# Altium PCB 智能灯.PcbDoc
Units mm, origin at the board's own origin, x right, y up, seen from the top; angles counter-clockwise.
Board outline 97.71 x 98.77 mm, 2 copper layers (Top Layer, Bottom Layer); 48 components, 37 nets, 191 pads, 32 vias.
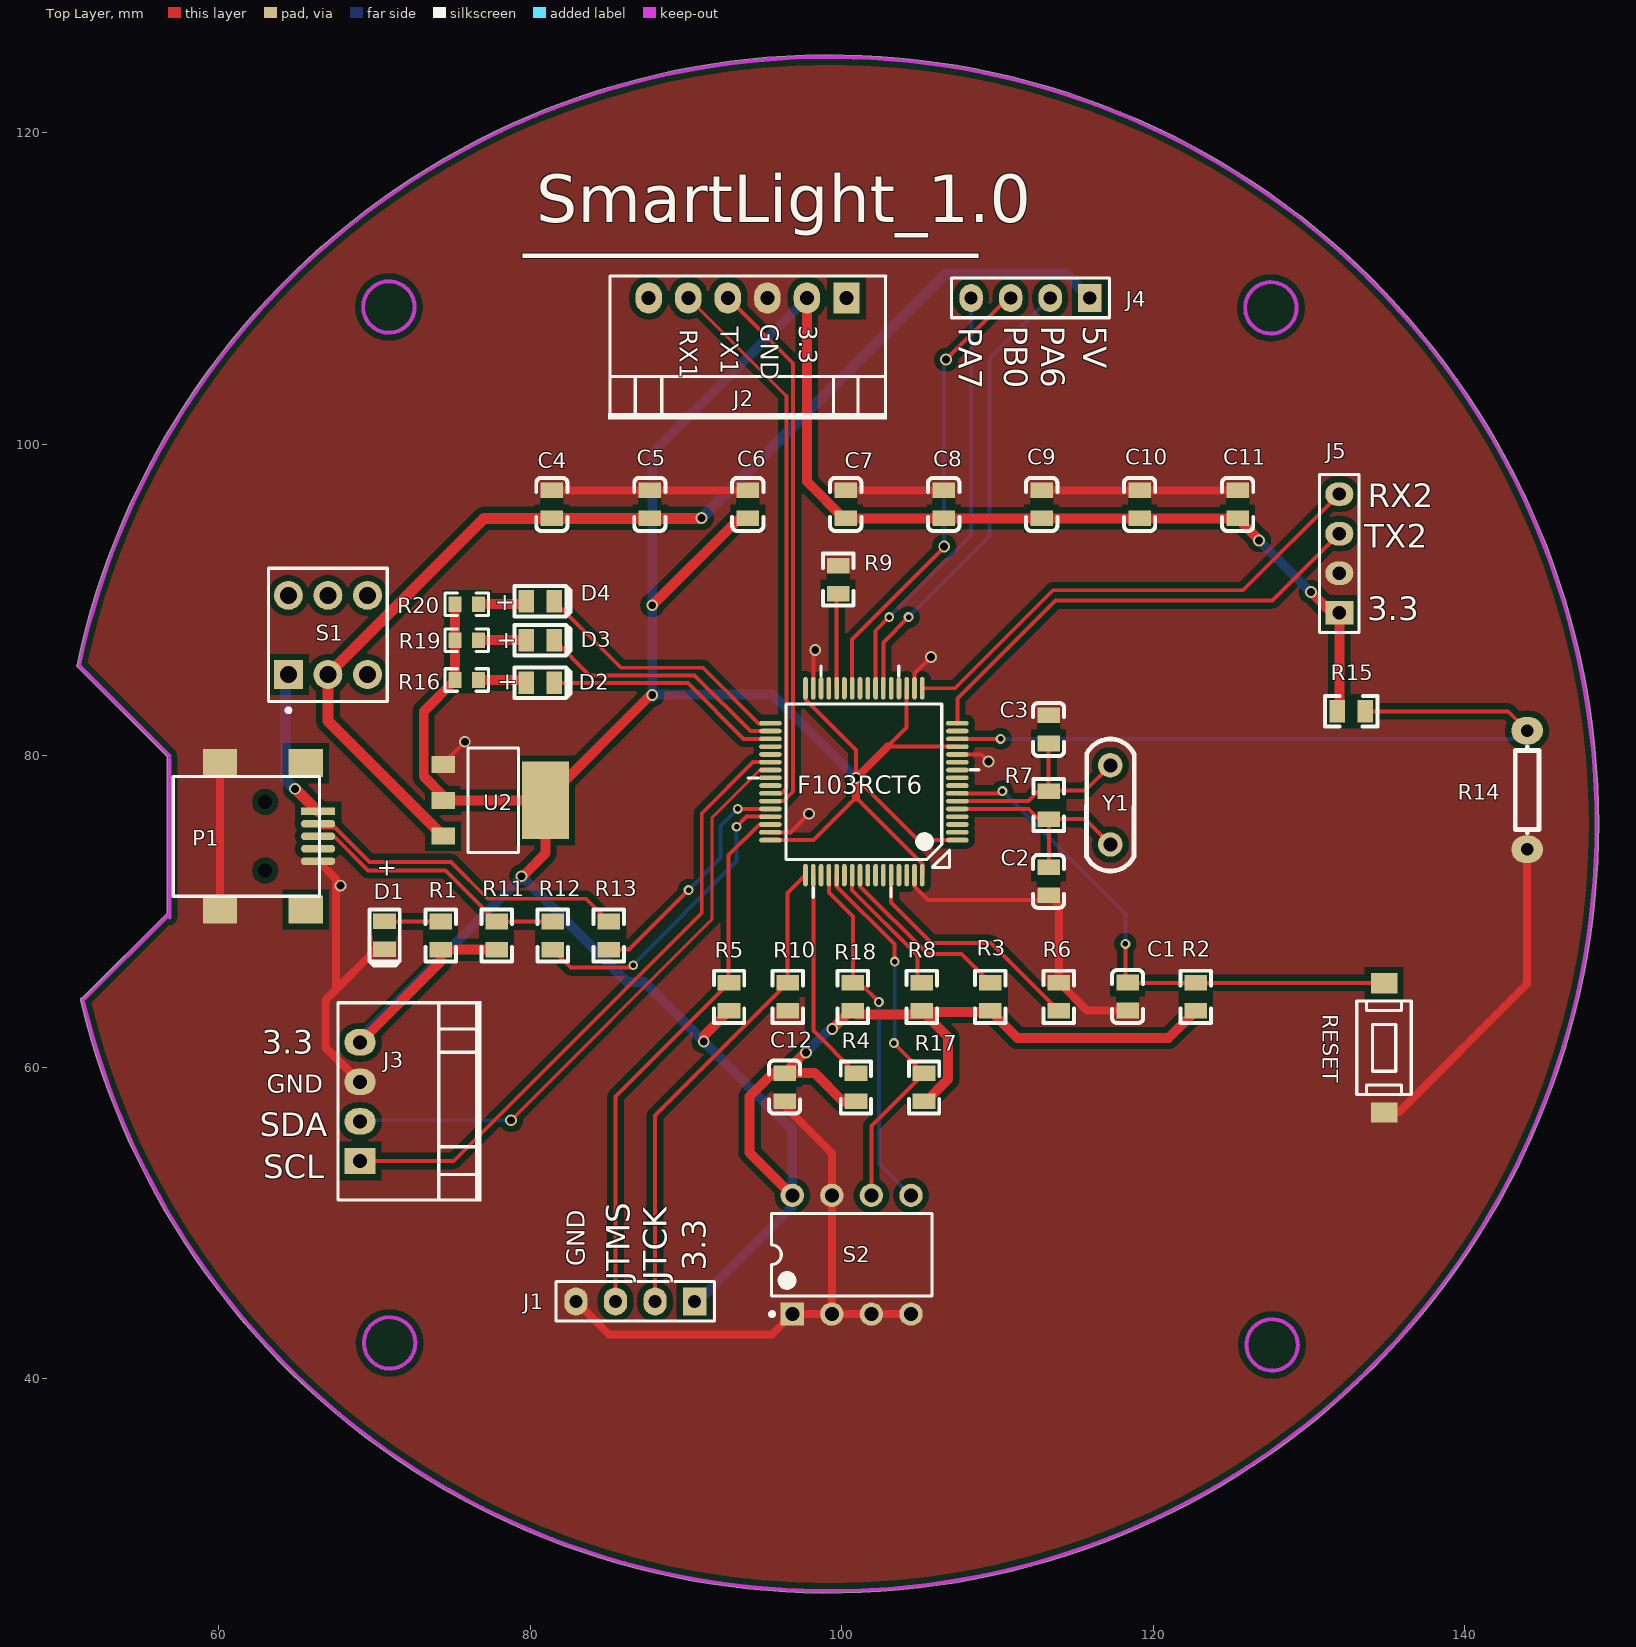
[diagram p0: Top Layer view]
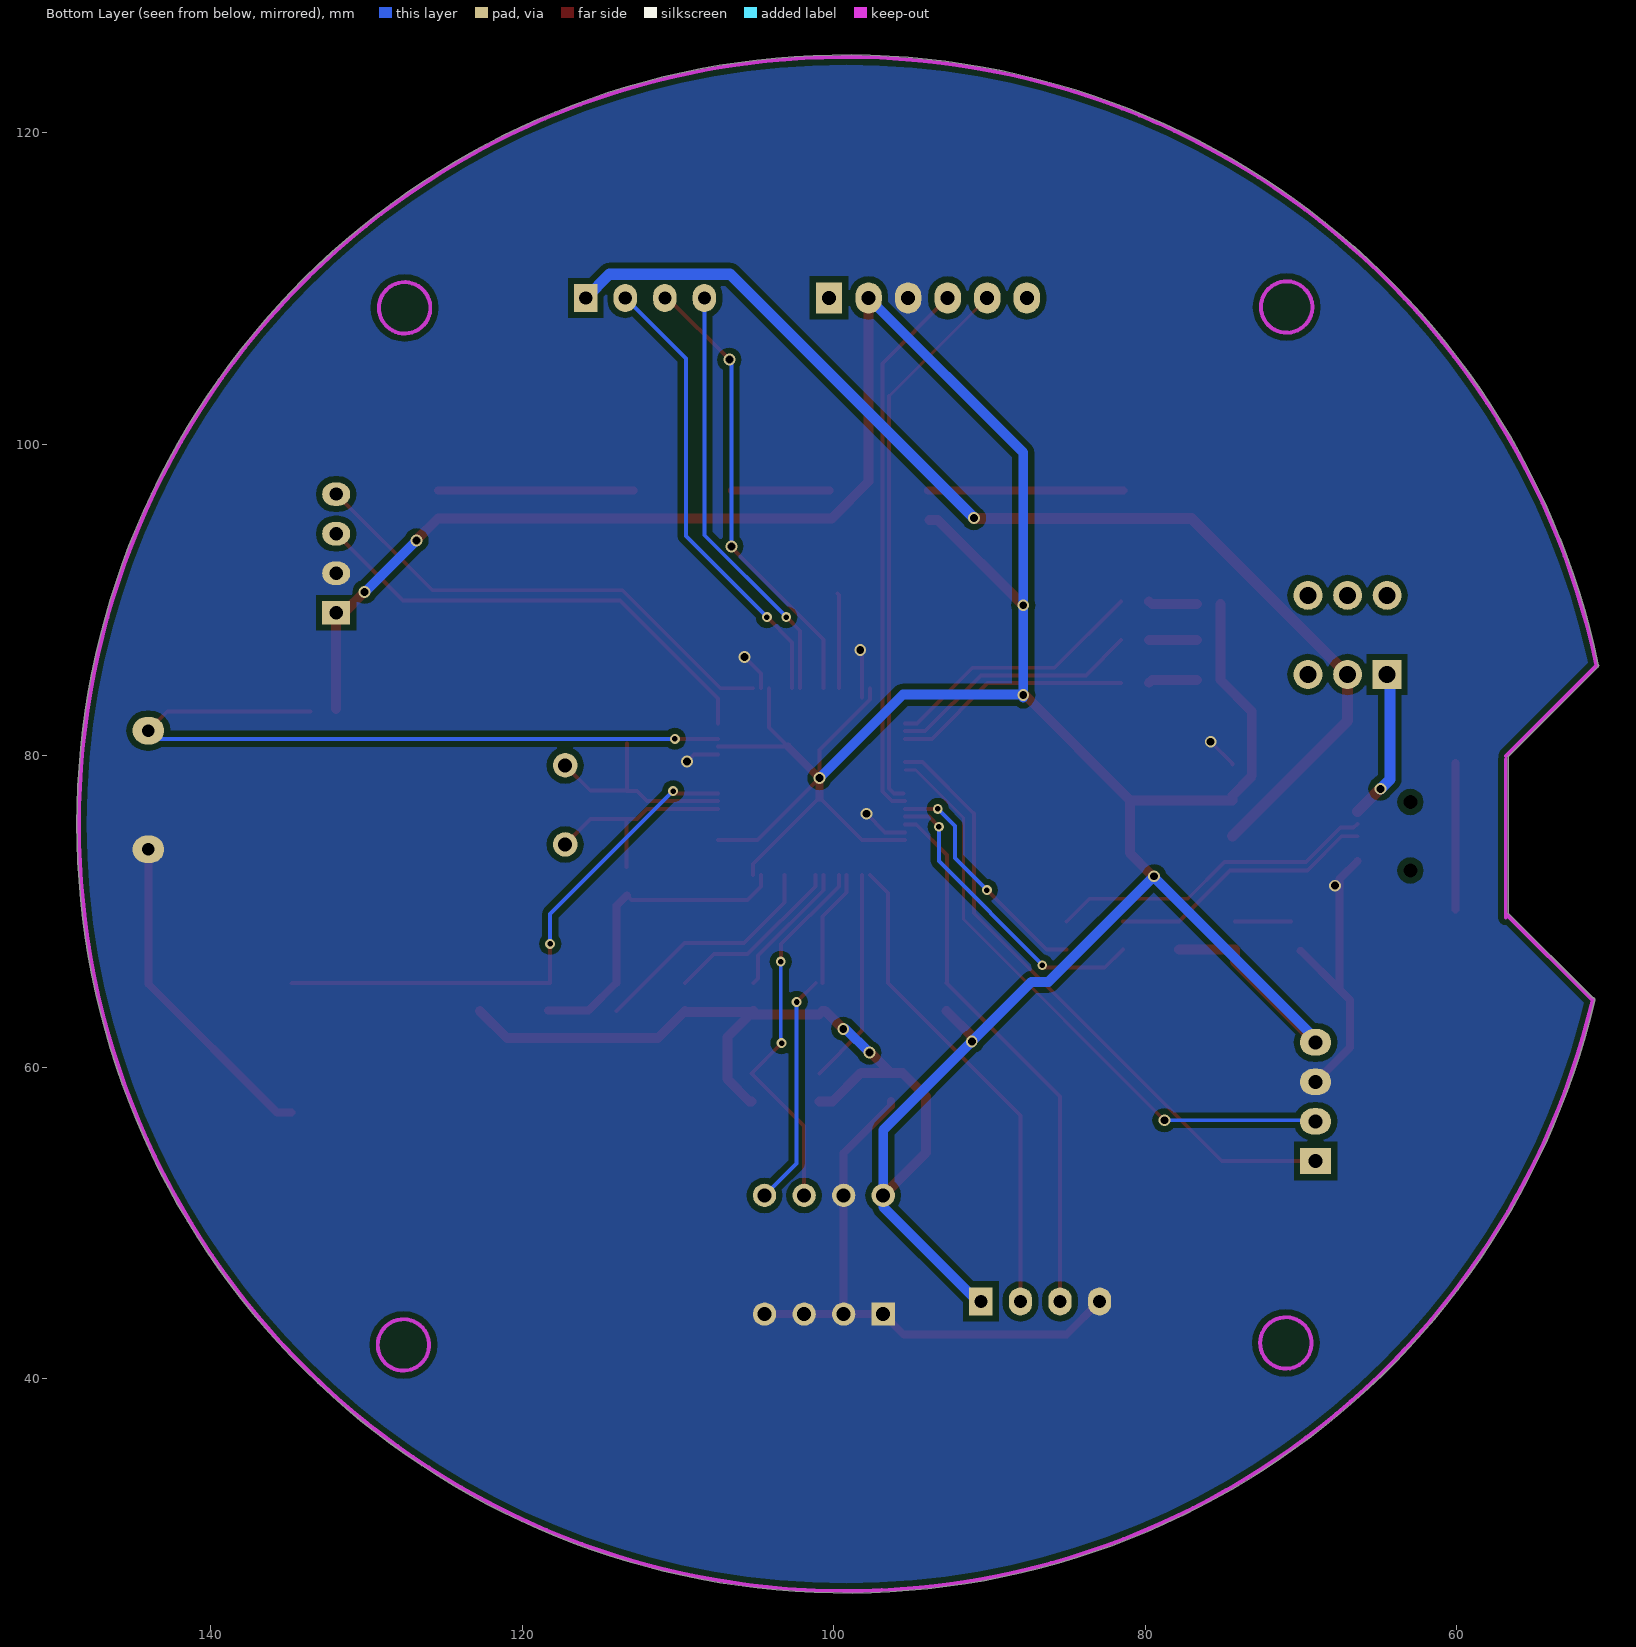
[diagram p1: Bottom Layer view, seen from below]
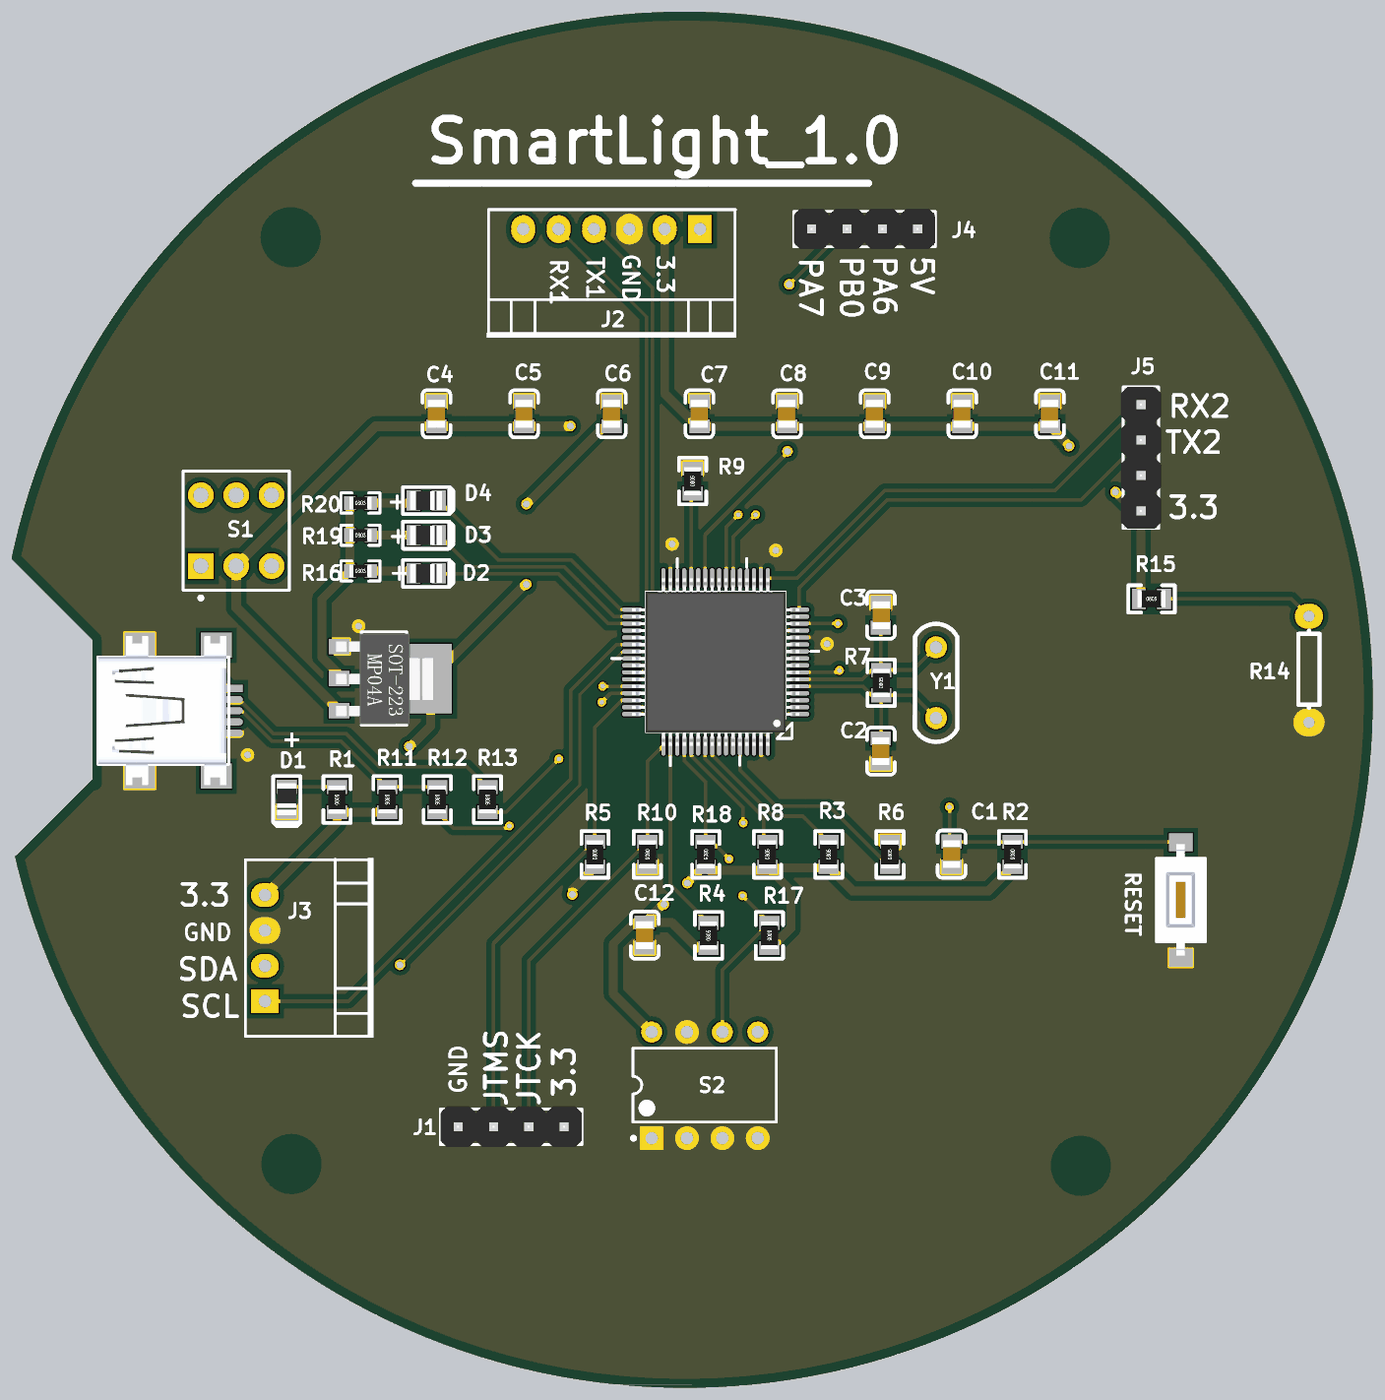
[diagram p2: 3D render of the assembled board from above, using the file's embedded part models]

## Layer stack, top to bottom
Top Solder: solder mask 0.0102, Solder Resist, Dk 3.5
Top Layer: signal copper 0.0356
Dielectric 1: dielectric 0.32, FR-4, Dk 4.8
Bottom Layer: signal copper 0.0356
Bottom Solder: solder mask 0.0102, Solder Resist, Dk 3.5

## Board outline
50.891,85.815 cw(c99.212,75.616) 148.598,75.616 cw(c99.212,75.616) 51.138,64.308 cw(c51.262,64.337) 51.254,64.464 56.692,69.903 56.692,79.932 50.93,85.695 cw(c51.016,85.789)

## Design rules (kind name [scope] priority, off if disabled: settings)
Clearance [All] p1: gap=0.178
PlaneConnect [All] p1: planeconnectstyle=Direct reliefexpansion=0.508 reliefentries=4 reliefconductorwidth=0.254 reliefairgap=0.254
PolygonConnect [All] p1: connectstyle=Direct reliefconductorwidth=0.254 reliefentries=4 polygonreliefangle="90 Angle" airgapwidth=0.254
RoutingVias [All] p1: holewidth=0.356 width=0.635 viastyle="Through Hole" minholewidth=0.305 minwidth=0.508 maxholewidth=0.711 maxwidth=1.27
SolderMaskExpansion [All] p1: expansion=0.102
Width [All] p1: maxlimit=1.016 minlimit=0.178 preferedwidth=0.254
28 further rules are at their usual default settings.

## Components (designator, comment, footprint, x,y, rotation, side; value= is the part's Value field where it differs from the comment)
C1 "0.1uF" 0805c 118.357,64.538 r270 top
C2 "22pF" 0805c 113.284,71.933 r90 top
C3 "22pF" 0805c 113.284,81.686 r270 top
C4 "10uF" 0805c 81.382,96.139 r90 top
C5 "0.1uF" 0805c 87.674,96.139 r90 top
C6 "10uF" 0805c 93.965,96.139 r90 top
C7 "0.1uF" 0805c 100.257,96.139 r90 top
C8 "0.1uF" 0805c 106.549,96.139 r90 top
C9 "0.1uF" 0805c 112.841,96.139 r90 top
C10 "0.1uF" 0805c 119.133,96.139 r90 top
C11 "0.1uF" 0805c 125.425,96.139 r90 top
C12 "104" 0805C 96.33,58.721 r90 top
D1 "LED" 0805d 70.637,68.466 r270 top
D2 "LED" 0805d 80.645,84.684 r0 top
D3 "LED" 0805d 80.645,87.427 r0 top
D4 "LED" 0805d 80.645,89.916 r0 top
F103RCT6 "STM32F103RCT6" LQFP64-0.5MM 101.422,78.334 r0 top (schematic designator U1)
J1 "SIP4" P4_2.54-1 86.741,44.958 r180 top
J2 "SIP6" P6_2.54-3 100.305,109.398 r180 top
J3 "SIP4" P4_2.54-3 69.063,53.975 r90 top
J4 "SIP4" P4_2.54-1 112.116,109.398 r180 top
J5 "SIP4" P4_2.54-1 131.953,92.989 r90 top
P1 "MiniUSB" USB_MINI_5P 57.074,74.828 r90 top
R1 "1k" 0805r 74.238,68.453 r90 top
R2 "10k" 0805r 122.733,64.516 r270 top
R3 "10k" 0805r 109.542,64.516 r90 top
R4 "10k" 0805r 100.914,58.699 r90 top
R5 "10k" 0805r 92.761,64.516 r90 top
R6 "10k" 0805r 113.939,64.516 r90 top
R7 "1M" 0805R 113.306,76.831 r90 top
R8 "10k" 0805r 105.145,64.516 r90 top
R9 "10k" 0805r 99.771,91.313 r90 top
R10 "10k" 0805r 96.52,64.516 r270 top
R11 "1k" 0805r 77.838,68.453 r270 top
R12 "1k" 0805r 81.439,68.453 r270 top
R13 "1k" 0805r 85.039,68.453 r270 top
R14 "Res2" AXIAL0.3 144.018,77.8 r270 top
R15 "10k" 0805R 132.715,82.855 r0 top
R16 "1k" 0603R 75.921,84.861 r0 top
R17 "4.7k" 0805R 105.283,58.699 r270 top
R18 "4.7k" 0805R 100.711,64.516 r270 top
R19 "1k" 0603R 75.921,87.427 r0 top
R20 "1k" 0603R 75.921,89.738 r0 top
RESET "SW-PB_DIP" KEY_SIM2P 134.823,61.239 r90 top
S1 "SW-DPDT" DPDT-6 67.005,87.757 r90 top
S2 "SW-DIP4" DIP-8 100.635,47.955 r90 top
U2 "AMS117-3.3" SOT-223 80.975,77.14 r270 top
Y1 "8MHz" 0.1UF 117.246,76.842 r270 top

## Footprints (in the part's own frame and the unit in brackets; to place one, negate y for a bottom-side part, rotate by r counter-clockwise, add the part's x,y. Pads: shape width x height; smd on the part's side, far side on the other; paste and mask are expansions set on the pad)
0.1UF [mil]
  round 62 hole 35.43: 1(-100,0) 2(100,0)
  silkscreen extent -166,-60 167,60
0603R [mm]
  rect 0.85x1 smd: 1(-0.75,0) 2(0.75,0)
  Top Layer pour cut-out: -0.33,0.495 -0.33,-0.495 0.33,-0.495 0.33,0.495
  silkscreen extent -1.4,-0.72 1.4,0.72, body extent -0.8,-0.46 0.8,0.44, height 0.5
0805c [mm]
  rect 1x1.45 smd: 1(-0.9,0) 2(0.9,0)
  Top Layer pour cut-out: -0.432,0.749 -0.432,-0.737 0.406,-0.737 0.406,0.749
  silkscreen extent -1.7,-1 1.7,1, body extent -1,-0.61 1,0.64, height 1
0805C [mm]
  rect 1x1.45 smd: 1(-0.9,0) 2(0.9,0)
  Top Layer pour cut-out: -0.432,0.749 -0.432,-0.737 0.406,-0.737 0.406,0.749
  silkscreen extent -1.7,-1 1.7,1, body extent -1,-0.61 1,0.64, height 1
0805d [mm]
  rect 1x1.45 smd: 1(-0.9,0) 2(0.9,0)
  Top Layer pour cut-out: -0.432,0.749 -0.432,-0.737 0.406,-0.737 0.406,0.749
  silkscreen extent -1.66,-0.98 1.94,0.98, body extent -1.16,-0.68 1.14,0.67, height 0.76
0805r [mm]
  rect 1x1.45 smd: 1(-0.9,0) 2(0.9,0)
  Top Layer pour cut-out: -0.432,0.749 -0.432,-0.737 0.406,-0.737 0.406,0.749
  silkscreen extent -1.68,-0.98 1.68,0.98, body extent -1,-0.62 1,0.63, height 0.5
0805R [mm]
  rect 1x1.45 smd: 1(-0.9,0) 2(0.9,0)
  Top Layer pour cut-out: -0.432,0.749 -0.432,-0.737 0.406,-0.737 0.406,0.749
  silkscreen extent -1.68,-0.98 1.68,0.98, body extent -1,-0.62 1,0.63, height 0.5
AXIAL0.3 [mil]
  oval 70x80 hole 32: 1(-150,0) 2(150,0)
  silkscreen extent -109,-30 109,30
DIP-8 [mm] "DIP; 8 Leads; Row Spacing 7.62 mm; Pitch 2.54 mm"
  rect 1.5x1.5 hole 0.9: 1(-3.81,3.81)
  round 1.5 hole 0.9: 2(-3.81,1.27) 3(-3.81,-1.27) 4(-3.81,-3.81) 5(3.81,-3.81) 6(3.81,-1.27) 7(3.81,1.27) 8(3.81,3.81)
  silkscreen extent -3.93,-5.15 2.65,5.23, body extent -3.6,-5.15 3.6,5.15, height 5.08
DPDT-6 [mm] "Switch; 6 Leads"
  rect 1.85x1.85 hole 1.1: 1(-2.54,2.54)
  round 1.85 hole 1.1: 2(-2.54,0) 3(-2.54,-2.54) 4(2.54,-2.54) 5(2.54,0) 6(2.54,2.54)
  silkscreen extent -4.96,-3.81 4.28,3.81
KEY_SIM2P [mm] "6x3.5mm"
  rect 1.3x1.7 smd: 1(-4.15,0) 2(4.15,0)
  silkscreen extent -3,-1.75 3,1.75, body extent -3.99,-1.8 4.01,1.85, height 4.2
LQFP64-0.5MM [mm] "10X10/12X12"
  oval 1.45x0.3 smd: 1(6,-3.75) 2(6,-3.25) 3(6,-2.75) 4(6,-2.25) 5(6,-1.75) 6(6,-1.25) 7(6,-0.75) 8(6,-0.25) 9(6,0.25) 10(6,0.75) 11(6,1.25) 12(6,1.75) 13(6,2.25) 14(6,2.75) 15(6,3.25) 16(6,3.75) 33(-6,3.75) 34(-6,3.25) 35(-6,2.75) 36(-6,2.25) 37(-6,1.75) 38(-6,1.25) 39(-6,0.75) 40(-6,0.25) 41(-6,-0.25) 42(-6,-0.75) 43(-6,-1.25) 44(-6,-1.75) 45(-6,-2.25) 46(-6,-2.75) 47(-6,-3.25) 48(-6,-3.75)
  oval 0.3x1.45 smd: 17(3.75,6) 18(3.25,6) 19(2.75,6) 20(2.25,6) 21(1.75,6) 22(1.25,6) 23(0.75,6) 24(0.25,6) 25(-0.25,6) 26(-0.75,6) 27(-1.25,6) 28(-1.75,6) 29(-2.25,6) 30(-2.75,6) 31(-3.25,6) 32(-3.75,6) 49(-3.75,-6) 50(-3.25,-6) 51(-2.75,-6) 52(-2.25,-6) 53(-1.75,-6) 54(-1.25,-6) 55(-0.75,-6) 56(-0.25,-6) 57(0.25,-6) 58(0.75,-6) 59(1.25,-6) 60(1.75,-6) 61(2.25,-6) 62(2.75,-6) 63(3.25,-6) 64(3.75,-6)
  silkscreen extent -7.45,-7.45 7.4,7.43, body extent -6.01,-6.03 6.01,6, height 1.75
P4_2.54-1 [mm]
  rect 1.5x1.8 hole 0.85: 1(-3.81,0)
  oval 1.5x1.8 hole 0.85: 2(-1.27,0) 3(1.27,0) 4(3.81,0)
  silkscreen extent -5.08,-1.27 5.08,1.27, body extent -5.08,-1.47 5.08,1.45, height 8.56
P4_2.54-3 [mm]
  rect 1.7x2 hole 0.9: 1(0,0)
  oval 1.7x2 hole 0.9: 2(2.54,0) 3(5.08,0) 4(7.62,0)
  silkscreen extent -2.62,-7.79 10.29,1.4
P6_2.54-3 [mm]
  rect 1.7x2 hole 0.9: 1(0,0)
  oval 1.7x2 hole 0.9: 2(2.54,0) 3(5.08,0) 4(7.62,0) 5(10.16,0) 6(12.7,0)
  silkscreen extent -2.62,-1.4 15.32,7.79
SOT-223 [mm]
  rect 1.1x1.5 smd: 1(-2.295,-6.575) 2(0.005,-6.575) 3(2.305,-6.575)
  rect 5x3 smd: 4(0,0)
  silkscreen extent -3.36,-4.98 3.34,-1.73, body extent -3.23,-6.81 3.27,0.15, height 1.7
USB_MINI_5P [mm]
  rect 0.5x2.2 smd: 1(1.6,-9.3)
  oval 0.5x2.2 smd: 2(0.8,-9.3) 3(0,-9.3) 4(-0.8,-9.3) 5(-1.6,-9.3)
  rect 1.8x2.2 smd: 6(-4.7,-3) 7(4.7,-3) 8(4.7,-8.5) 9(-4.7,-8.5)
  round 0 hole 0.9: 10(2.2,-5.9) 11(-2.2,-5.9)
  silkscreen extent -3.85,-9.4 3.85,0, body extent -5.33,-9.22 5.37,-0.02, height 3.95

## Part data
C1 C2 C3 C4 C5 C6 C7 C8 C9 C10 C11: library part CAP, "Capacitor/小容量电容"
C12: library part Cap, "Capacitor"
F103RCT6: library part STM32F103RD, "LQFP64"
R1 R2 R3 R4 R5 R6 R8 R9 R10 R11 R12 R13: library part Res
R7 R17 R18: library part Res1
R14: "Resistor"
R15: library part Res_1
R16 R19 R20: library part Res_2
S1: "Double-Pole, Double-Throw Switch"
S2: "DIP Switch"
Y1: library part J晶振-3

## Via types
v1: diameter 0.762, hole 0.508, Top Layer to Bottom Layer, 20 vias
v2: diameter 0.635, hole 0.356, Top Layer to Bottom Layer, 12 vias

## Nets (pads, with @x,y where several pads share a name; then routed paths per layer and width w, separated by ;. In a path a pad name is that pad's centre, name@x,y a point inside that pad or via, vN(x,y) a via of type N, cw(c..) or ccw(c..) an arc to the next point about the centre after c; other vN are vias at no path point)
3.3V: C6.1 C7.1 C8.1 C9.1 C10.1 C11.1 C12.2 F103RCT6.1 F103RCT6.13 F103RCT6.19 F103RCT6.32 F103RCT6.48 F103RCT6.64 J1.1 J2.2 J3.4 J5.1 R1.1 R2.2 R3.1 R4.1 R5.1 R8.1 R11.2 R15.1 R16.1 R17.2 R18.2 R19.1 R20.1 S2.8 U2.2 U2.4 | length 305.7
  Top Layer w0.254: F103RCT6.48 98.188,74.584 100.914,77.31 105.172,73.052 F103RCT6.64 ; F103RCT6.32 97.672,83.615 100.914,80.373 v1(100.914,78.562) 104.893,74.584 F103RCT6.1 ; F103RCT6.19 104.172,81.82 102.936,80.584 F103RCT6.13
  Top Layer w0.508: 100.914,77.31 v1(100.914,78.562) 102.936,80.584
  Top Layer w0.635: J3.4 74.238,66.77 R1.1 R11.2 ; R20.1 R19.1 R16.1 73.155,82.846 73.155,78.68 74.4,77.434 U2.2 80.97,77.135 U2.4 ; v1@79.718,72.479 80.975,73.736 U2.4 ; v1@87.757,83.922 U2.4 ; v1(87.833,89.662) 93.298,95.127 C6.1@93.853,95.127 ; v1(91.135,61.646) 91.135,61.99 R5.1 ; S2.8 94.082,54.508 94.082,58.115 95.587,59.621 C12.2 ; v1(97.714,60.935) 97.643,60.935 C12.2 ; J2.2 97.765,97.606 100.132,95.239 C7.1 C8.1 C9.1 C10.1 C11.1 126.797,93.867 v1(126.797,93.828) ; v1(99.39,62.459) 100.548,63.616 R18.2 100.954,63.373 105.207,63.373 R8.1@105.207,63.554 ; R4.1 100.087,57.799 98.265,59.621 C12.2 ; R8.1 R8.1@105.207,63.554 ; R17.2 105.408,57.799 106.832,59.223 106.832,61.929 R8.1@105.207,63.554 ; R2.2 120.991,61.874 111.284,61.874 R3.1 109.48,63.554 R8.1@105.207,63.554 ; v1(130.124,90.526) 131.47,89.179 J5.1 R15.1@131.953,82.993
  Bottom Layer w0.635: J3.4 69.063,61.824 v1@79.464,72.225 ; v1(79.426,72.263) v1@79.464,72.225 ; v1@87.833,83.744 v1(87.833,83.896) v1@87.833,83.922 ; J1.1 90.754,44.958 96.825,51.029 S2.8 96.825,55.956 v1(91.135,61.646) 87.3,65.481 86.208,65.481 v1@79.464,72.225 ; v1(97.714,60.935) 99.238,62.459 v1(99.39,62.459) ; J2.2 87.833,99.466 v1(87.833,89.662) v1@87.833,83.922 ; v1(100.914,78.562) 95.555,83.922 v1@87.833,83.922 ; v1(126.797,93.828) 130.099,90.526 v1(130.124,90.526)
24_SCL: F103RCT6.53 R17.1 S2.6 | length 24.3
  Top Layer w0.254: F103RCT6.53 99.672,71.615 103.378,67.91 103.378,66.802 v2(103.403,66.777) ; S2.6 101.905,56.221 R17.1 v2@103.378,61.504
  Bottom Layer w0.254: v2(103.353,61.544) 103.403,61.595 v2(103.403,66.777)
24_SDA: F103RCT6.52 R18.1 S2.5 | length 22.6
  Top Layer w0.254: F103RCT6.52 99.172,71.226 100.711,69.687 R18.1 ; R18.1@101.157,65.416 v2(102.387,64.186)
  Bottom Layer w0.254: v2(102.387,64.186) 102.387,53.823 S2.5
BAT_5V: P1.1 S1.1 | length 9.7
  Top Layer w0.711: v1(64.897,77.876) 64.926,77.876 P1.1
  Bottom Layer w0.711: S1.1 64.287,85.039 64.287,78.486 v1(64.897,77.876)
BOOT0: F103RCT6.60 R6.1 | length 15.4
  Top Layer w0.254: F103RCT6.60 103.172,70.564 105.766,67.97 109.585,67.97 R6.1
BOOT1: F103RCT6.28 R9.1 | length 6.1
  Top Layer w0.254: F103RCT6.28 99.672,90.314 R9.1
GND: C1.2 C2.1 C3.1 C4.2 C5.2 C6.2 C7.2 C8.2 C9.2 C10.2 C11.2 C12.1 D1.2 F103RCT6.12 F103RCT6.18 F103RCT6.31 F103RCT6.47 F103RCT6.63 J1.4 J2.3 J3.3 J5.2 P1.5 P1.6 P1.7 R6.2 R9.2 R10.2 R14.2 RESET.1 S2.1 S2.2 S2.3 S2.4 S2.7 U2.1 | length 153.4
  Top Layer w0.254: U2.1 74.4,79.505 v1(75.794,80.899) ; F103RCT6.47 96.699,75.084 v1(97.892,76.276) ; F103RCT6.31@98.172,83.726 F103RCT6.31 98.172,86.666 v1(98.298,86.792) ; F103RCT6.63 104.672,71.615 105.549,70.739 112.99,70.739 C2.1 ; F103RCT6.18 104.672,85.267 v1(105.74,86.335) ; F103RCT6.12 108.969,80.084 v1(109.423,79.629)
  Top Layer w0.508: P1.6 P1.7 ; P1.5 67.526,72.076 67.526,71.945 ; v1(67.818,71.653) 67.526,71.945 ; J3.3 66.853,61.265 66.853,64.313 67.526,64.986 ; D1.2@70.017,67.477 67.526,64.986 ; C4.2 C5.2 C6.2 ; J1.4 85.065,42.824 95.504,42.824 S2.1 S2.2 ; C12.1 96.33,57.518 99.365,54.483 S2.7 S2.2 ; C7.2 C8.2 ; S2.4 S2.3 S2.2 ; C9.2 C10.2 C11.2 ; C2.1 113.939,70.378 R6.2 113.975,65.416 115.753,63.638 C1.2 ; RESET.1 135.753,57.089 144.018,65.354 R14.2 ; 67.526,64.986 67.526,71.755 67.526,71.945
IN_5V: C4.1 C5.1 J4.1 S1.2 U2.3 | length 73.7
  Top Layer w0.711: U2.3 67.005,82.229 S1.2 77.027,95.239 C4.1 C5.1 90.997,95.239 v1(90.997,95.261)
  Bottom Layer w0.711: v1(90.997,95.261) 106.658,110.922 114.402,110.922 J4.1
JTCK: F103RCT6.49 J1.2 R10.1 | length 31.4
  Top Layer w0.254: J1.2 88.011,56.907 R10.1 96.52,71.181 F103RCT6.49
JTDI: F103RCT6.50 R4.2 | length 13.9
  Top Layer w0.254: F103RCT6.50 98.172,62.341 R4.2
JTDO: F103RCT6.55 R8.2 | length 8.8
  Top Layer w0.254: F103RCT6.55 100.672,71.363 104.877,67.159 104.877,65.685 R8.2
JTMS: F103RCT6.46 J1.3 R5.2 | length 35.2
  Top Layer w0.254: J1.3 85.471,58.126 R5.2 92.735,65.441 92.735,73.615 94.704,75.584 F103RCT6.46
JTRST: F103RCT6.56 R3.2 | length 11.7
  Top Layer w0.254: F103RCT6.56 101.172,71.615 105.528,67.259 107.699,67.259 R3.2
LED1: D2.2 F103RCT6.35 | length 15.4
  Top Layer w0.254: D2.2 81.57,84.658 90.119,84.658 93.694,81.084 F103RCT6.35
LED2: D3.2 F103RCT6.34 | length 16.3
  Top Layer w0.254: D3.2 83.806,85.166 90.551,85.166 94.134,81.584 F103RCT6.34
LED3: D4.2 F103RCT6.33 | length 17.1
  Top Layer w0.254: D4.2 85.812,85.649 91.084,85.649 94.65,82.084 F103RCT6.33
NetD1_1: D1.1 R1.2 | length 3.6
  Top Layer w0.254: D1.1 70.65,69.353 R1.2
NetD2_1: D2.1 R16.2 | length 3.1
  Top Layer w0.635: R16.2 79.567,84.861 D2.1
NetD3_1: D3.1 R19.2 | length 3.1
  Top Layer w0.635: R19.2 D3.1
NetD4_1: D4.1 R20.2 | length 3.1
  Top Layer w0.635: R20.2 79.567,89.738 D4.1
NetP1_2: P1.2 R13.1 | length 21.3
  Top Layer w0.254: P1.2 66.619,75.383 67.454,75.383 69.659,73.177 74.905,73.177 77.267,70.815 83.577,70.815 R13.1
NetP1_3: P1.3 R11.1 R12.1 | length 17.3
  Top Layer w0.254: P1.3 67.398,74.828 69.582,72.644 74.547,72.644 R11.1 R12.1
OSC_IN: C2.2 F103RCT6.5 R7.1 Y1.2 | length 13.8
  Top Layer w0.254: F103RCT6.5 111.986,76.584 112.638,75.931 R7.1 ; C2.2@113.306,72.854 R7.1 ; Y1.2 115.617,75.931 R7.1
OSC_OUT: C3.2 F103RCT6.6 R7.2 Y1.1 | length 13.9
  Top Layer w0.254: F103RCT6.6 111.983,77.084 112.631,77.731 R7.2 R7.2@113.284,77.753 ; C3.2 R7.2@113.284,77.753 ; Y1.1 115.617,77.753 R7.2@113.284,77.753
PA0: F103RCT6.14 R14.1 R15.2 | length 47.7
  Top Layer w0.254: F103RCT6.14 v2(110.204,81.084) ; R15.2 142.773,82.855 R14.1
  Bottom Layer w0.254: v2(110.204,81.084) 143.491,81.084 R14.1
PA6: F103RCT6.22 J4.2 | length 29.5
  Top Layer w0.254: F103RCT6.22 102.672,87.28 v2(104.292,88.9)
  Bottom Layer w0.254: v2(104.292,88.9) 109.499,94.107 109.499,105.512 J4.2
PA7: F103RCT6.23 J4.4 | length 27.6
  Top Layer w0.254: F103RCT6.23 102.172,88.024 v2(103.048,88.9)
  Bottom Layer w0.254: v2(103.048,88.9) 108.306,94.158 J4.4
PA11: F103RCT6.44 R13.2 | length 15.3
  Top Layer w0.254: R13.2 86.349,67.553 v2(90.17,71.374) ; v2(93.32,76.581) 93.322,76.584 F103RCT6.44
  Bottom Layer w0.254: v2(90.17,71.374) 92.227,73.431 92.227,75.489 v2(93.32,76.581)
PA12: F103RCT6.45 R12.2 | length 19.8
  Top Layer w0.254: R12.2 82.596,66.396 86.462,66.396 v2(86.614,66.548) ; v2(93.243,75.438) 93.889,76.084 F103RCT6.45
  Bottom Layer w0.254: v2(86.614,66.548) 86.614,66.599 93.243,73.228 v2(93.243,75.438)
PB0: F103RCT6.26 J4.3 | length 29.4
  Top Layer w0.254: F103RCT6.26 100.672,87.464 106.604,93.396 106.604,93.421 v1(106.578,93.447) ; v1(106.705,105.435) 110.668,109.398 J4.3
  Bottom Layer w0.254: v1(106.578,93.447) 106.578,105.308 v1(106.705,105.435)
RESET: C1.1 F103RCT6.7 R2.1 RESET.2 | length 35.2
  Top Layer w0.254: F103RCT6.7 110.273,77.584 110.312,77.622 v2(110.312,77.724) ; v2(118.212,67.92) 118.212,65.416 R2.1 134.797,65.416 RESET.2
  Bottom Layer w0.254: v2(110.312,77.724) 118.212,69.825 v2(118.212,67.92)
RX1: F103RCT6.42 J2.5 | length 35.2
  Top Layer w0.203: J2.5 96.452,103.09
  Top Layer w0.254: F103RCT6.42@95.536,77.561 96.117,77.561 96.452,77.895 96.452,103.09
RX2: F103RCT6.17 J5.4 | length 31.9
  Top Layer w0.254: F103RCT6.17 107.27,84.334 113.563,90.627 125.781,90.627 J5.4
SCL: F103RCT6.38 J3.1 | length 40.7
  Top Layer w0.254: J3.1 75.082,53.975 91.008,69.901 91.008,76.28 94.312,79.584 F103RCT6.38
SDA: F103RCT6.39 J3.2 | length 39.5
  Top Layer w0.203: v1(78.765,56.591) 91.669,69.494 91.669,76.012 94.74,79.084 F103RCT6.39
  Bottom Layer w0.203: J3.2 69.139,56.591 v1(78.765,56.591)
TX1: F103RCT6.43 J2.4 | length 35.1
  Top Layer w0.254: J2.4 96.884,105.199 96.884,77.716 96.251,77.084 F103RCT6.43
TX2: F103RCT6.16 J5.3 | length 30.5
  Top Layer w0.254: F103RCT6.16 107.422,83.673 113.716,89.967 127.66,89.967 J5.3
pads on no net: F103RCT6.2 F103RCT6.3 F103RCT6.4 F103RCT6.8 F103RCT6.9 F103RCT6.10 F103RCT6.11 F103RCT6.15 F103RCT6.20 F103RCT6.21 F103RCT6.24 F103RCT6.25 F103RCT6.27 F103RCT6.29 F103RCT6.30 F103RCT6.36 F103RCT6.37 F103RCT6.40 F103RCT6.41 F103RCT6.51 F103RCT6.54 F103RCT6.57 F103RCT6.58 F103RCT6.59 F103RCT6.61 F103RCT6.62 J2.1 J2.6 P1.4 P1.8 P1.9 P1.10 P1.11 S1.3 S1.4 S1.5 S1.6

## Polygon pours and split planes (outlines as drawn)
GND on Top Layer "Top Layer-No Net" (solid, remove dead copper, pour order 4): 40.208,129.21 40.818,128.6 158.674,128.6 158.674,32.309 153.873,27.508 149.911,23.546 38.227,23.546
GND on Bottom Layer "Top Layer-No Net" (solid, remove dead copper, pour order 6): 44.78,128.981 45.39,129.591 156.591,129.591 156.591,32.207 147.091,22.708 144.932,20.549 37.414,20.549

## Keep-outs
Keep-Out Layer:
  circle w0.254: c70.917,108.814 r1.65
  circle w0.254: c127.559,108.763 r1.65
  circle w0.254: c70.968,42.291 r1.65
  circle w0.254: c127.635,42.164 r1.65
  lines w0.254: 51.262,64.337 ccw(c99.212,75.616) 51.016,85.789 56.82,79.985 ; 51.321,64.351 56.82,69.85 ; 56.845,69.621 56.845,79.756

## Silkscreen, mask and mechanical layers (free items; w line width, h text height)
Top Overlay:
  text "SmartLight_1.0" at 80.366,114.275 h3.05
  text "______________" at 79.553,112.954 h3.05
  text "GND" at 94.793,107.747 h1.14 r270
  text "3.3" at 97.257,107.645 h1.14 r270
  text "PB0" at 110.439,107.62 h1.52 r270
  text "PA6" at 112.827,107.62 h1.52 r270
  text "5V" at 115.519,107.62 h1.52 r270
  text "TX1" at 92.227,107.544 h1.14 r270
  text "PA7" at 107.518,107.518 h1.52 r270
  text "RX1" at 89.611,107.391 h1.14 r270
  text "RX2" at 133.782,95.961 h1.52
  text "TX2" at 133.553,93.37 h1.52
  text "+" at 77.724,89.357 h1.14
  text "3.3" at 133.756,88.697 h1.52
  text "+" at 77.8,86.893 h1.14
  text "+" at 77.876,84.252 h1.14
  text "+" at 70.155,72.288 h1.14
  text "3.3" at 62.763,60.858 h1.52
  text "GND" at 63.068,58.369 h1.14
  text "SDA" at 62.636,55.55 h1.52
  text "SCL" at 62.84,52.883 h1.52
  text "GND" at 83.49,47.219 h1.14 r90
  text "3.3" at 91.262,46.939 h1.52 r90
  text "JTCK" at 88.748,46.33 h1.52 r90
  text "JTCK" at 88.748,46.33 h1.52 r90
  text "JTMS" at 86.385,46.279 h1.52 r90